# EAGLE board Płytka_PCB_v1 (EAGLE 9.7.0)
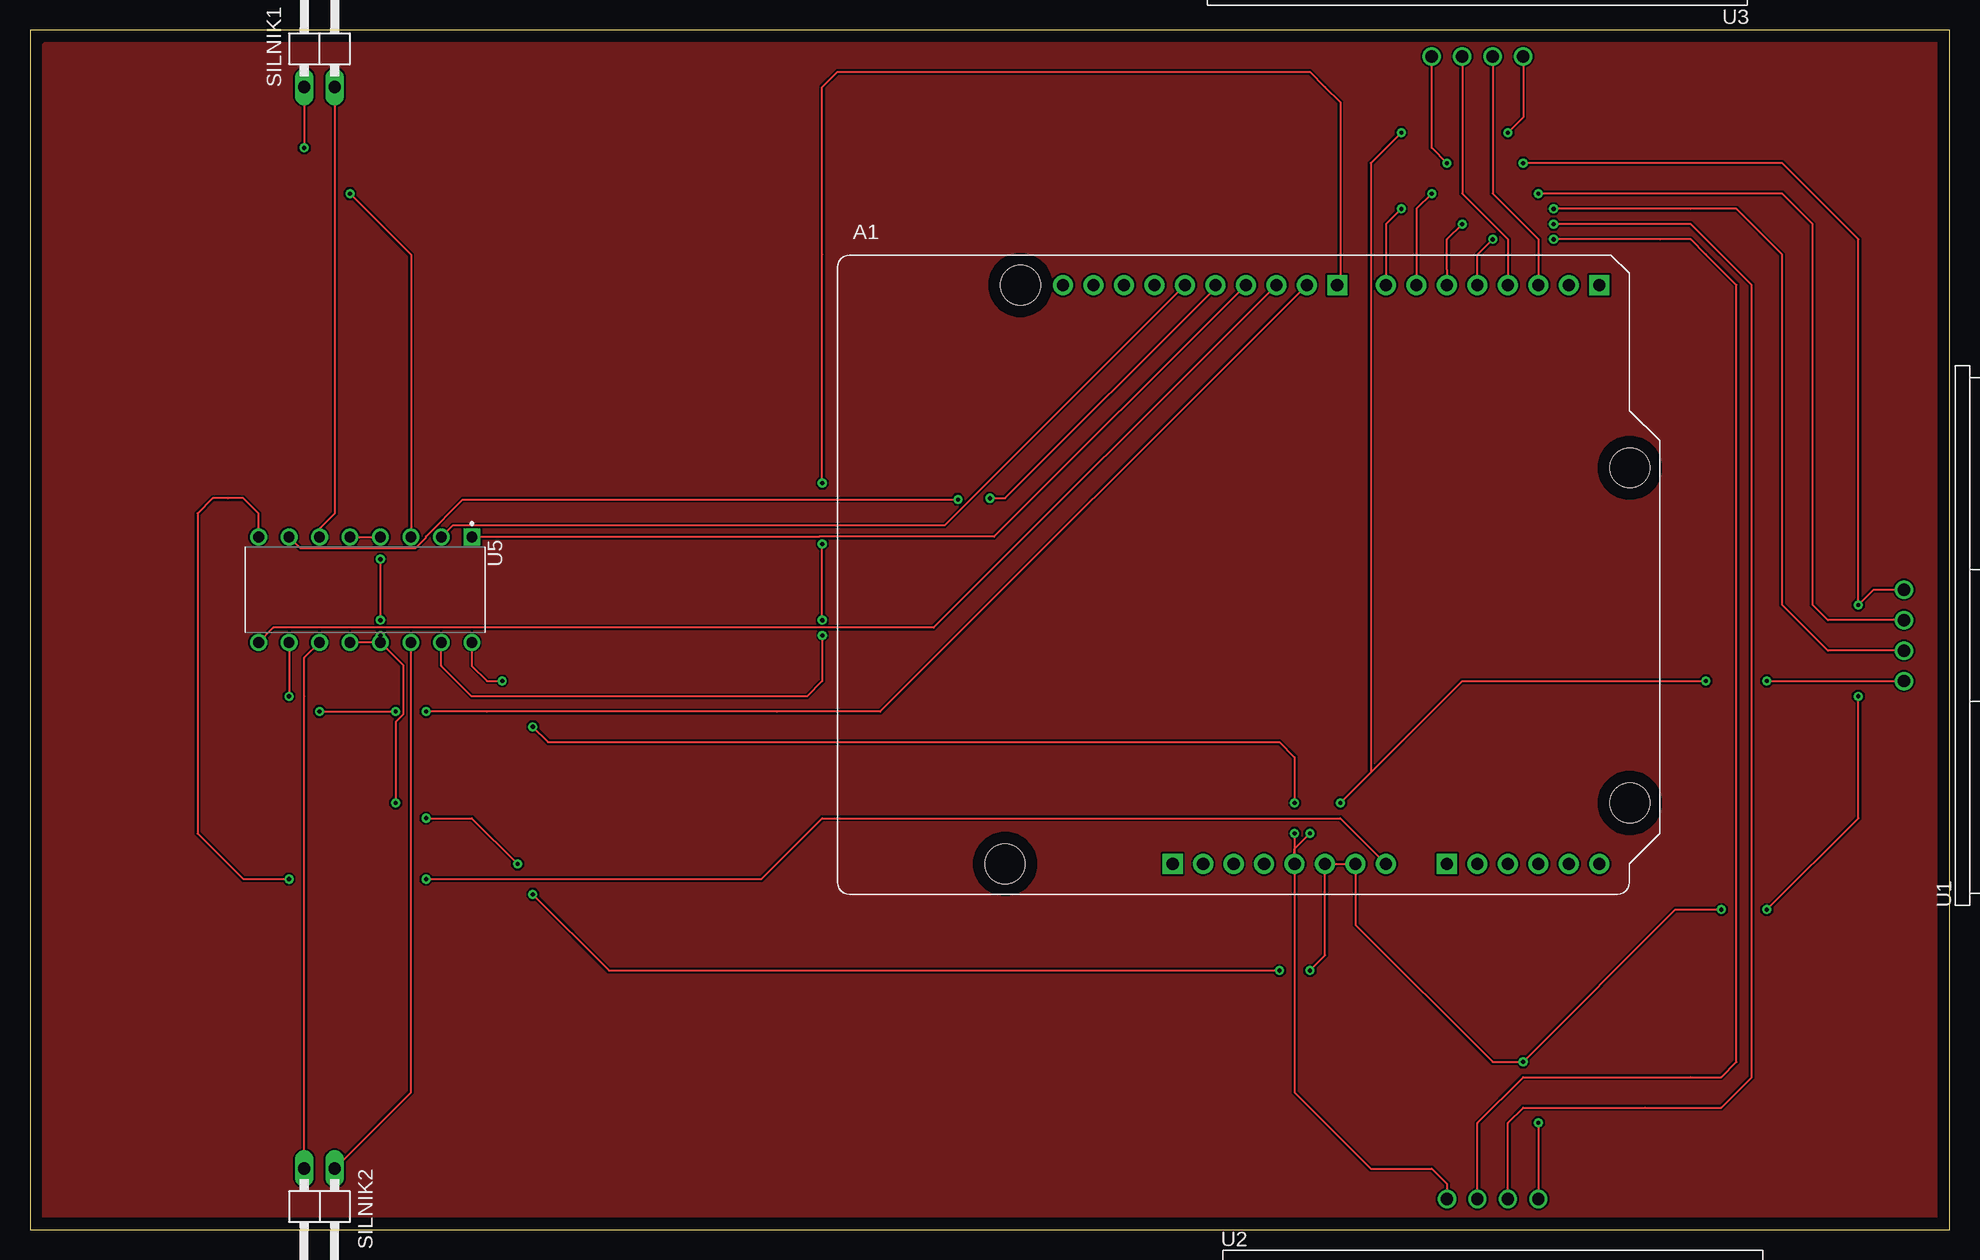
[diagram p0: board, top side]
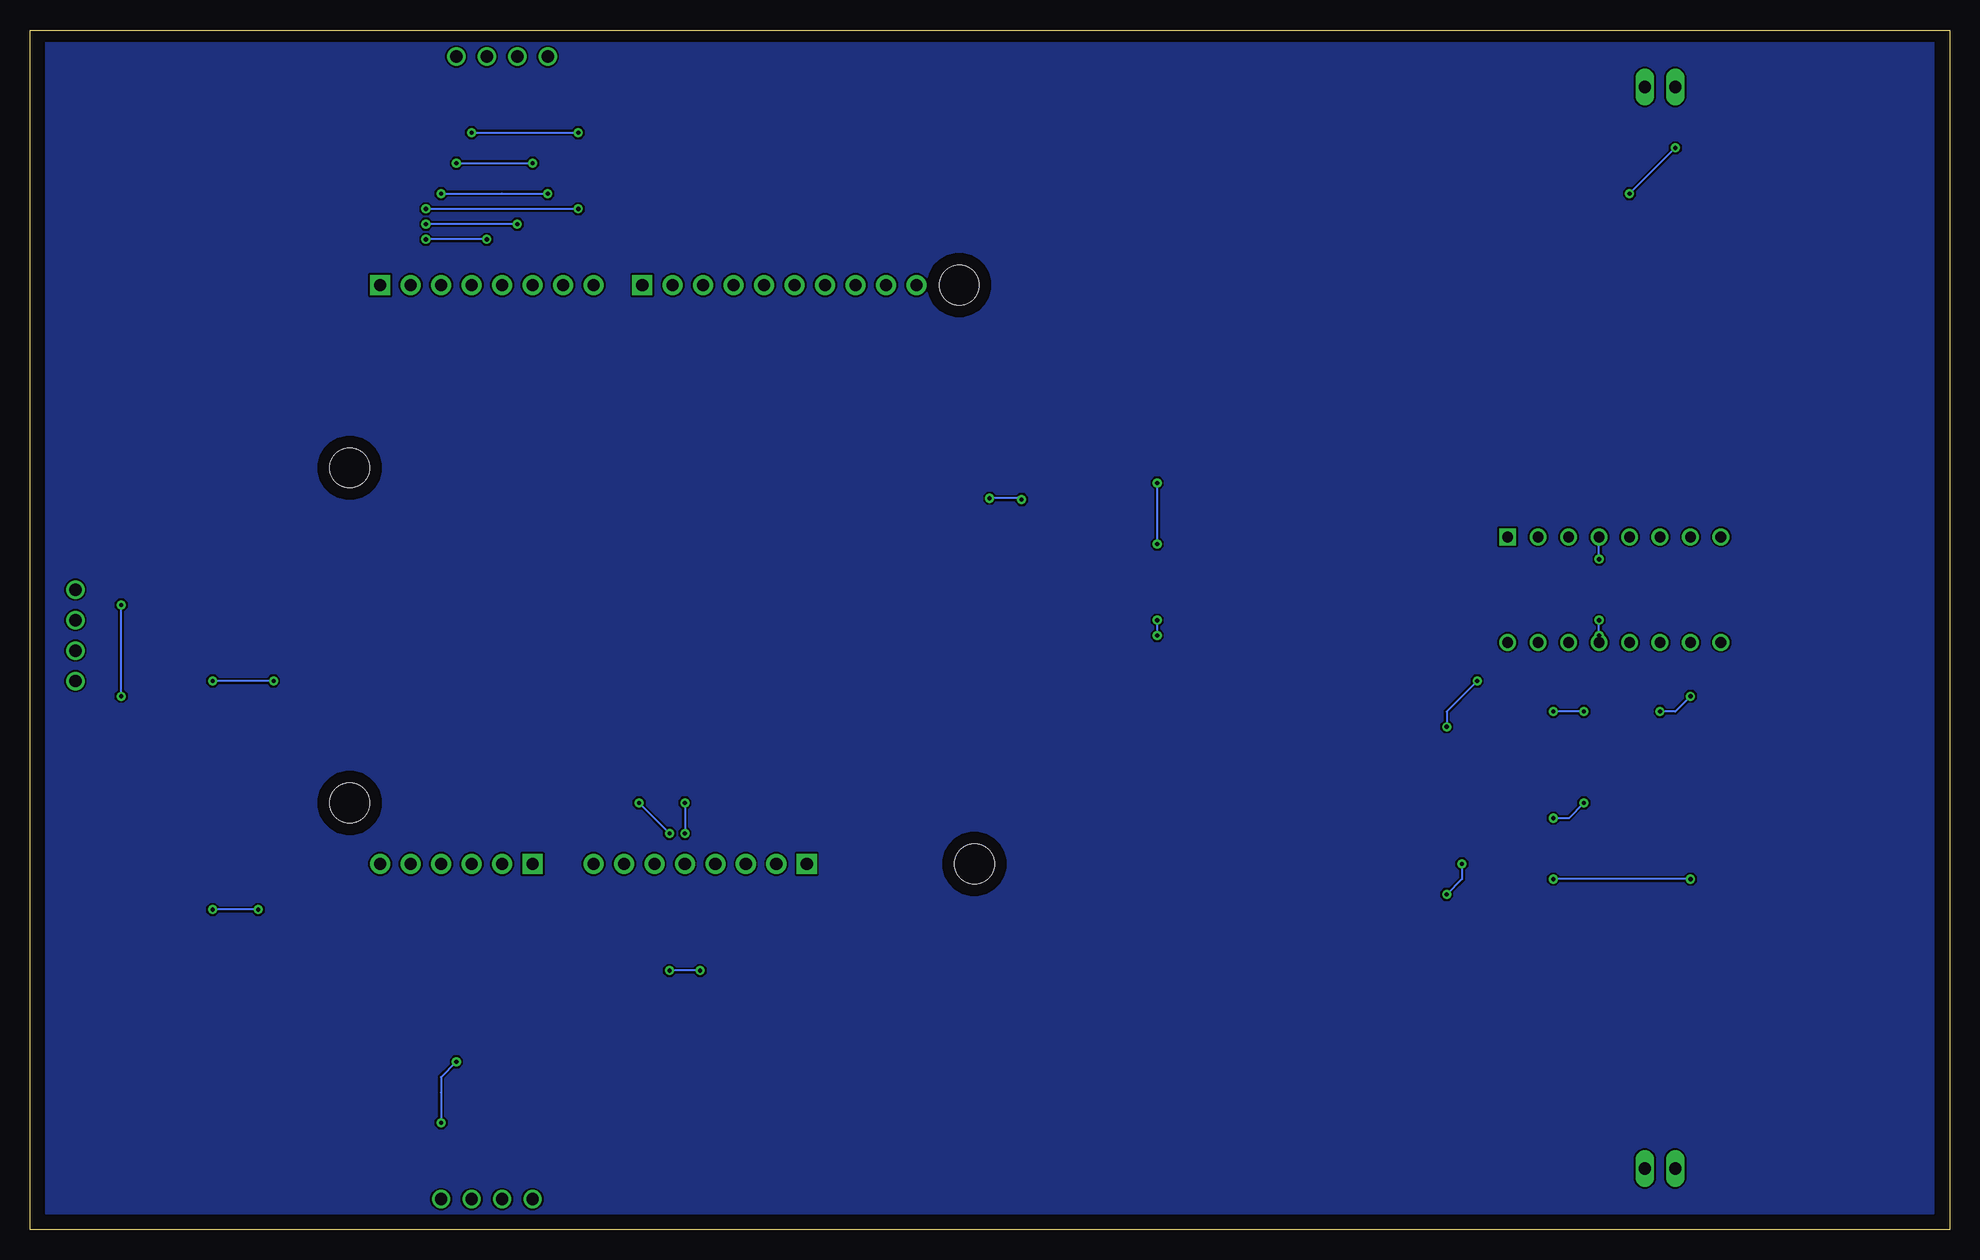
[diagram p1: board, bottom side, seen from below]

Size 160 x 100 mm. Coordinates in mm from the lower left corner, seen from the top.
Outline: 0,0 160,0 160,100 0,100 0,0
Copper layers (1*16): Top / Bottom
Stack-up Default Layer Stack: Top User Defined 0.035mm / Dielectric-1 User Defined 1.5mm / Bottom User Defined 0.035mm
Design rules: minimum copper width 6mil, minimum drill size 0.35mm, copper clearance wire_polygon to wire_polygon 6mil, copper clearance wire_polygon to pad_smd 6mil, copper clearance wire_polygon to via 6mil, copper clearance pad_smd to pad_smd 6mil, copper clearance pad_smd to via 6mil, copper clearance via to via 6mil, copper clearance smd to pad (same net) 6mil, copper clearance smd to via (same net) 6mil, copper clearance smd to smd (same net) 6mil, dimension clearance 40mil, restrict clearance 0mil, drill distance 6mil, keepout clearance 0mil

## Footprints (pad centres in the part's own frame; a part is rotated, then mirrored left to right if it is on the bottom)
ARDUINO_A000066 = drill 1.016 pad 1.676: 3V3 35.56,2.54; 5V 38.1,2.54; A1 53.34,2.54; A2 55.88,2.54; A3 58.42,2.54; A4 60.96,2.54; A4(SDA) 21.336,50.8; A5 63.5,2.54; A5(SCL) 18.796,50.8; AREF 23.876,50.8; D1 60.96,50.8; D2 58.42,50.8; D3 55.88,50.8; D4 53.34,50.8; D5 50.8,50.8; D6 48.26,50.8; D7 45.72,50.8; D9 39.116,50.8; D10 36.576,50.8; D11 34.036,50.8; D12 31.496,50.8; D13 28.956,50.8; GND_1 43.18,2.54; GND_2 40.64,2.54; GND_3 26.416,50.8; IOREF 30.48,2.54; RST 33.02,2.54; VIN 45.72,2.54 | drill 1.016 pad 1.676 square: A0 50.8,2.54; D0 63.5,50.8; D8 41.656,50.8; P1 27.94,2.54 | hole 3.3: 66.04,35.56; 66.04,7.62; 15.24,50.8; 13.97,2.54
1X02/90 = drill 1.016 long: 1 -1.27,-3.81; 2 1.27,-3.81
XCVR_HC-SR04 = drill 1.02: 1 -3.81,0; 2 -1.27,0; 3 1.27,0; 4 3.81,0
DIP880W50P254L2000H510Q16 = drill 0.9 pad 1.25 square: 1 -4.4,8.89 | drill 0.9 pad 1.25: 2 -4.4,6.35; 3 -4.4,3.81; 4 -4.4,1.27; 5 -4.4,-1.27; 6 -4.4,-3.81; 7 -4.4,-6.35; 8 -4.4,-8.89; 9 4.4,-8.89; 10 4.4,-6.35; 11 4.4,-3.81; 12 4.4,-1.27; 13 4.4,1.27; 14 4.4,3.81; 15 4.4,6.35; 16 4.4,8.89

## Placement (x,y rotation side)
A1  A000066  [ARDUINO_A000066]  67.31,27.94 0 top
SILNIK1  PINHD-1X2/90  [1X02/90]  24.13,99.06 0 top
SILNIK2  PINHD-1X2/90  [1X02/90]  24.13,1.27 180 top
U1  HC-SR04  [XCVR_HC-SR04]  156.21,49.53 90 top
U2  HC-SR04  [XCVR_HC-SR04]  121.92,2.54 0 top
U3  HC-SR04  [XCVR_HC-SR04]  120.65,97.79 180 top
U5  L293D  [DIP880W50P254L2000H510Q16]  27.94,53.34 270 top

## Library data of the parts
A1 = A000066; AVAILABILITY: In Stock; CHECK_PRICES: https://www.snapeda.com/parts/A000066/Arduino/view-part/?ref=eda; DESCRIPTION: Arduino UNO Rev3 Microcontroller Board, ATmega328P | Arduino A000066; MF: Arduino; MP: A000066; PACKAGE: Non-Standard Arduino; PRICE: None; PURCHASE-URL: https://www.snapeda.com/api/url_track_click_mouser/?unipart_id=7027813&manufacturer=Arduino&part_name=A000066&search_term=None; SNAPEDA_LINK: https://www.snapeda.com/parts/A000066/Arduino/view-part/?ref=snap
SILNIK1 SILNIK2 = Connector; CATEGORY: CONNECTOR; SUB-CATEGORY: PIN-HEADER
U1-U3 = HC-SR04; AVAILABILITY: Not in stock; CHECK_PRICES: https://www.snapeda.com/parts/HC-SR04/SparkFun+Electronics/view-part/?ref=eda; DESCRIPTION: HC-SR04 Ultrasonic Sensor Qwiic Platform Evaluation Expansion Board; MF: SparkFun Electronics; MP: HC-SR04; PACKAGE: None; PRICE: None; SNAPEDA_LINK: https://www.snapeda.com/parts/HC-SR04/SparkFun+Electronics/view-part/?ref=snap
U5 = L293D; AVAILABILITY: In Stock; CHECK_PRICES: https://www.snapeda.com/parts/L293D/STMicroelectronics/view-part/?ref=eda; DESCRIPTION: Bipolar Motor Driver - Parallel 16-PowerDIP; MF: STMicroelectronics; MP: L293D; PACKAGE: DIP-16 STMicroelectronics; PRICE: None; PURCHASE-URL: https://www.snapeda.com/api/url_track_click_mouser/?unipart_id=3077057&manufacturer=STMicroelectronics&part_name=L293D&search_term=None; SNAPEDA_LINK: https://www.snapeda.com/parts/L293D/STMicroelectronics/view-part/?ref=snap

## Nets
3V3: A1.3V3
+9V: A1.VIN U5.8
GND: A1.GND_1 A1.GND_2 U1.4 U2.4 U3.4 U5.4 U5.5 U5.12 U5.13
GND_3: A1.GND_3
N$1: A1.D2 U3.2
N$2: SILNIK1.1 U5.3
N$3: SILNIK1.2 U5.6
N$4: A1.D8 U5.15
N$5: SILNIK2.2 U5.11
N$6: SILNIK2.1 U5.14
N$7: A1.D11 U5.1
N$8: A1.5V U1.1 U2.1 U3.1 U5.16
N$9: A1.D9 U5.10
N$10: A1.D12 U5.7
N$11: A1.D10 U5.9
N$12: A1.D13 U5.2
N$13: A1.D4 U2.2
N$14: A1.D5 U2.3
N$15: A1.D3 U3.3
N$16: A1.D6 U1.3
N$17: A1.D7 U1.2

## Tracks (layer width: path | path; a pad name or v marks a point on that pad's centre or on a via)
+9V  (via drill 0.35)
  Top 0.152: U5.8 19.05,59.69 17.78,60.96 16.51,60.96 15.24,60.96 13.97,59.69 13.97,33.02 17.78,29.21 v21.59,29.21 | v33.02,29.21 60.96,29.21 66.04,34.29 109.22,34.29 A1.VIN
  Bottom 0.152: v21.59,29.21 v33.02,29.21
GND  (via drill 0.35)
  Top 0.152: v125.73,8.89 U2.4 | U5.5 U5.4 | U5.13 v29.21,49.53 | v29.21,50.8 v29.21,55.88 | U5.13 U5.12 | v30.48,35.56 30.48,42.32 31.09,42.93 31.09,47.06 U5.13 | v33.02,34.29 36.83,34.29 v40.64,30.48 | v41.91,27.94 48.26,21.59 63.5,21.59 v104.14,21.59 | v106.68,21.59 107.95,22.86 A1.GND_2 A1.GND_1 110.49,25.4 121.92,13.97 v124.46,13.97 137.16,26.67 v140.97,26.67 | v144.78,26.67 152.4,34.29 v152.4,44.45 | U1.4 153.67,53.34 v152.4,52.07 152.4,82.55 146.05,88.9 v124.46,88.9 | v118.11,88.9 116.84,90.17 U3.4
  Bottom 0.152: v124.46,13.97 125.73,12.7 125.73,11.43 v125.73,8.89 | v29.21,49.53 v29.21,50.8 | v29.21,55.88 U5.4 | v30.48,35.56 31.75,34.29 v33.02,34.29 | v40.64,30.48 40.64,29.21 v41.91,27.94 | v104.14,21.59 v106.68,21.59 | v140.97,26.67 v144.78,26.67 | v152.4,44.45 v152.4,52.07 | v124.46,88.9 v118.11,88.9
  other vias: 29.21,48.94
N$1
  Top 0.152: U3.2 121.92,86.36 125.73,82.55 A1.D2
N$2  (via drill 0.35)
  Top 0.152: SILNIK1.1 22.86,91.44 v22.86,90.17 | v26.67,86.36 31.75,81.28 U5.3
  Bottom 0.152: v22.86,90.17 v26.67,86.36
N$3
  Top 0.152: SILNIK1.2 25.4,59.69 24.13,58.42 U5.6
N$4  (via drill 0.35)
  Top 0.152: U5.15 34.29,46.99 36.83,44.45 64.77,44.45 66.04,45.72 v66.04,49.53 | A1.D8 109.22,78.74 109.22,93.98 107.95,95.25 106.68,96.52 67.31,96.52 66.04,95.25 66.04,81.28 v66.04,62.23 | v66.04,50.8 v66.04,57.15
  Bottom 0.152: v66.04,49.53 v66.04,50.8 | v66.04,57.15 66.04,60.96 v66.04,62.23
N$5
  Top 0.152: SILNIK2.2 22.86,44.45 22.86,47.67 U5.11
N$6
  Top 0.152: SILNIK2.1 31.75,11.43 31.75,48.26 U5.14
N$7
  Top 0.152: U5.1 65.77,57.74 65.79,57.76 80.36,57.76 A1.D11
N$8  (via drill 0.35)
  Top 0.152: 105.41,29.21 A1.5V 105.41,31.75 v106.68,33.02 | 105.41,29.21 105.41,25.4 105.41,11.43 110.49,6.35 111.76,5.08 116.84,5.08 118.11,3.81 U2.1 | U5.16 36.83,46.99 38.1,45.72 v39.37,45.72 | v41.91,41.91 43.18,40.64 44.45,40.64 104.14,40.64 105.41,39.37 v105.41,35.56 | v105.41,33.02 105.41,29.21 | v109.22,35.56 111.76,38.1 | 111.76,38.1 119.38,45.72 v139.7,45.72 | v144.78,45.72 U1.1 | U3.1 124.46,92.71 v123.19,91.44 | v114.3,91.44 111.76,88.9 111.76,38.1
  Bottom 0.152: v39.37,45.72 41.91,43.18 v41.91,41.91 | v105.41,35.56 v105.41,33.02 | v106.68,33.02 v109.22,35.56 | v139.7,45.72 v144.78,45.72 | v123.19,91.44 v114.3,91.44
N$9  (via drill 0.35)
  Top 0.152: U5.10 v21.59,44.45 | v24.13,43.18 v30.48,43.18 | v33.02,43.18 38.1,43.18 62.23,43.18 70.87,43.18 A1.D9
  Bottom 0.152: v21.59,44.45 22.86,43.18 v24.13,43.18 | v30.48,43.18 v33.02,43.18
N$10  (via drill 0.35)
  Top 0.152: v77.34,60.85 36.08,60.85 33.02,57.79 33.02,57.69 32.14,56.81 22.52,56.81 U5.7 | v80.01,60.96 81.28,60.96 98.81,78.49 A1.D12
  Bottom 0.152: v77.34,60.85 77.45,60.96 v80.01,60.96
N$11
  Top 0.152: A1.D10 75.32,50.18 20.29,50.18 U5.9
N$12
  Top 0.152: A1.D13 76.22,58.7 35.25,58.7 U5.2
N$13  (via drill 0.35)
  Top 0.152: U2.2 120.65,8.89 124.46,12.7 138.43,12.7 140.97,12.7 142.24,13.97 142.24,78.74 139.7,81.28 138.43,82.55 135.89,82.55 v127,82.55 | A1.D4 120.65,81.28 121.28,81.92 v121.92,82.55
  Bottom 0.152: v121.92,82.55 v127,82.55
N$14  (via drill 0.35)
  Top 0.152: U2.3 123.19,8.89 124.46,10.16 134.62,10.16 140.97,10.16 143.51,12.7 143.51,78.74 138.43,83.82 v127,83.82 | A1.D5 118.11,80.01 118.11,81.28 118.11,82.55 v119.38,83.82
  Bottom 0.152: v119.38,83.82 v127,83.82
N$15
  Top 0.152: U3.3 119.38,86.36 123.19,82.55 A1.D3
N$16  (via drill 0.35)
  Top 0.152: U1.3 149.86,50.8 148.59,52.07 148.59,83.82 146.05,86.36 v125.73,86.36 | v116.84,86.36 115.57,85.09 A1.D6
  Bottom 0.152: v125.73,86.36 120.65,86.36 v116.84,86.36
N$17  (via drill 0.35)
  Top 0.152: U1.2 149.86,48.26 146.05,52.07 146.05,81.28 142.24,85.09 138.43,85.09 v127,85.09 | A1.D7 113.03,82.55 113.03,83.82 v114.3,85.09
  Bottom 0.152: v127,85.09 118.11,85.09 v114.3,85.09
N$18
  pour Top: 31.75,99.06 1.27,99.06 0,97.79 0,1.27 1.27,0 160.02,0 160.02,100.33 33.02,100.33
N$19
  pour Bottom: 1.27,99.06 1.27,1.27 158.75,1.27 158.75,99.06